# Altium PCB PCB1.PcbDoc
Units mm, origin at the board's own origin, x right, y up, seen from the top; angles counter-clockwise.
Board outline 52.58 x 36.07 mm, 2 copper layers (Top Layer, Bottom Layer); 11 components, 21 nets, 62 pads, 0 vias.
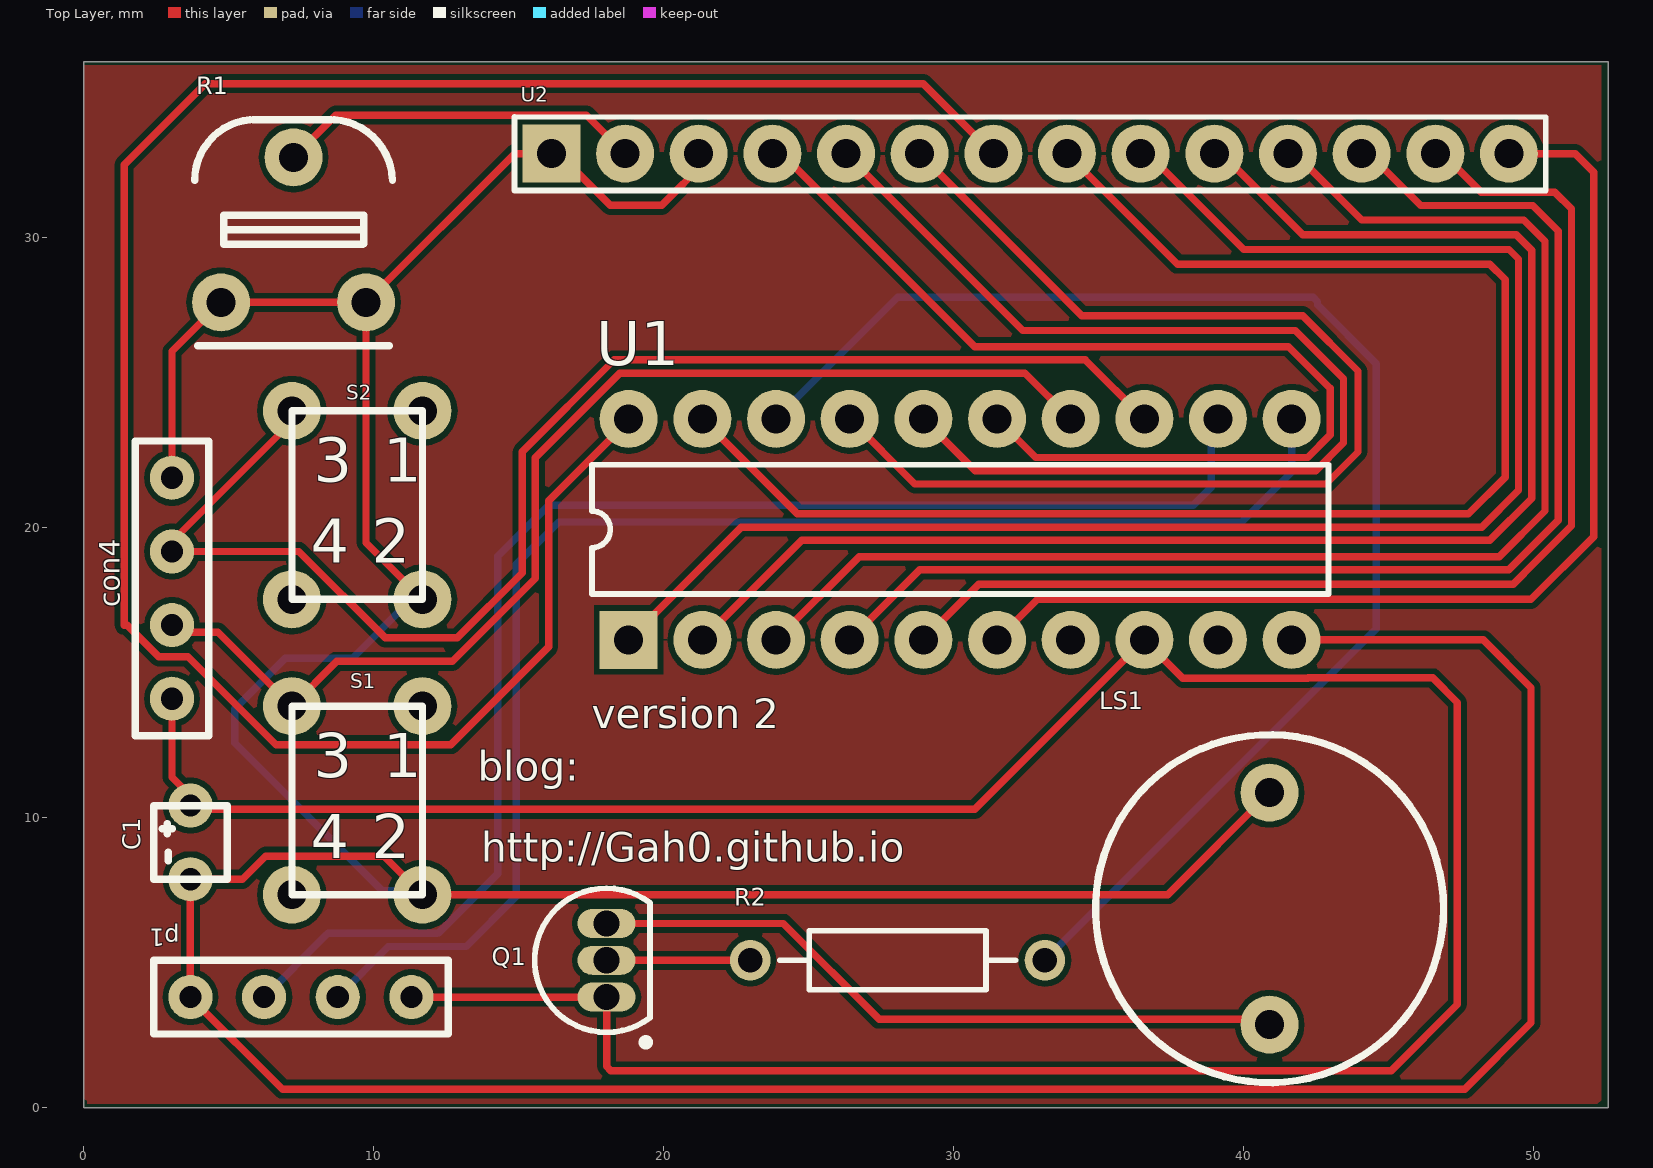
[diagram p0: Top Layer view]
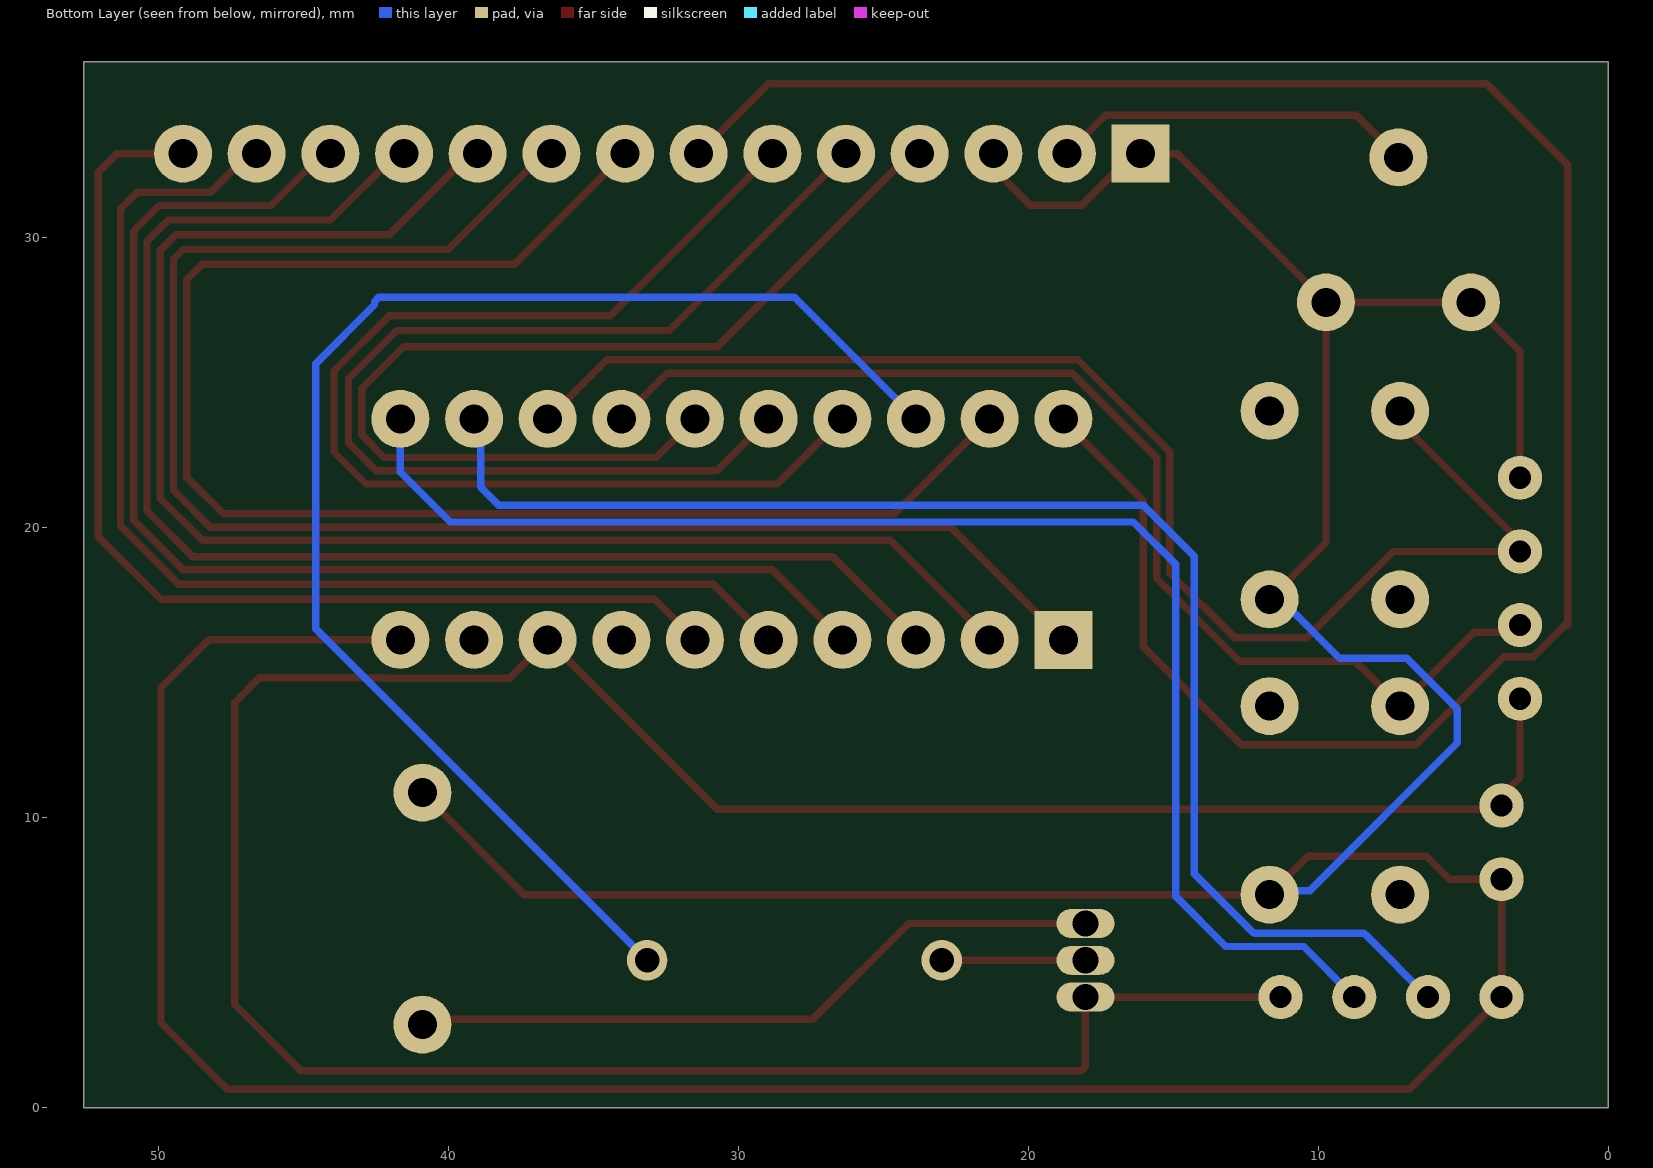
[diagram p1: Bottom Layer view, seen from below]

## Layer stack, top to bottom
Top Solder: solder mask 0.0102, Solder Resist, Dk 3.5
Top Layer: signal copper 0.0356
Dielectric 1: dielectric 0.32, FR-4, Dk 4.8
Bottom Layer: signal copper 0.0356
Bottom Solder: solder mask 0.0102, Solder Resist, Dk 3.5

## Board outline
0,0 0,36.068 52.578,36.068 52.578,0

## Design rules (kind name [scope] priority, off if disabled: settings)
Clearance [All] p1: gap=0.203 ignorepadtopadclearanceinfootprint=FALSE
PolygonConnect [All] p1: connectstyle=Direct reliefconductorwidth=0.254 reliefentries=4 polygonreliefangle="90 Angle" airgapwidth=0.254
RoomDefinition SHEET1 [InComponentClass('SHEET1')] p1: confinementstyle=ConfineIn formatcopy=TRUE lockcomponents=FALSE outline 26.162,1.524 95.504,1.524 95.504,40.132 26.162,40.132
RoutingVias [All] p1: holewidth=0.711 width=1.27 viastyle="Through Hole" minholewidth=0.711 minwidth=1.27 maxholewidth=0.711 maxwidth=1.27
SolderMaskExpansion [All] p1: expansion=0.102 istentingtop=FALSE
UnRoutedNet [All] p1: checkbadconnections=TRUE
Width [All] p1: maxlimit=0.5 minlimit=0.254 preferedwidth=0.254
29 further rules are at their usual default settings.

## Components (designator, comment, footprint, x,y, rotation, side; value= is the part's Value field where it differs from the comment)
C1 "Cap" LED 3.683,7.874 r270 top value=0.1uF
con4 "ultrasonic" sonic 3.048,14.097 r90 top
LS1 "Speaker" SPEAKER 40.894,6.858 r90 top
p1 "POWER" POWER 3.683,3.81 r0 top
Q1 "2N3906" TO-92A 18.034,5.08 r0 top
R1 "RPot" RESADJ 4.739,27.766 r0 top value=10k
R2 "Res2" AXIAL-0.4 28.067,5.08 r180 top value=220R
S1 "SW-PB" BOTTOM 7.184,13.843 r0 top
S2 "SW-PB" BOTTOM 7.184,24.026 r0 top
U1 "IAP15F2K61S2" DIP20 18.796,16.129 r90 top
U2 "LM016L" LCD1602 16.129,32.893 r90 top

## Footprints (in the part's own frame and the unit in brackets; to place one, negate y for a bottom-side part, rotate by r counter-clockwise, add the part's x,y. Pads: shape width x height; smd on the part's side, far side on the other; paste and mask are expansions set on the pad)
AXIAL-0.4 [mm] "Axial Device, Thru-Hole; 2 Leads; 0.4 in Pin Spacing"
  round 1.4 hole 0.85: 1(-5.08,0) 2(5.08,0)
  silkscreen extent -4.06,-1.02 4.06,1.02
BOTTOM [mm]
  round 2 hole 1: 1(0,0) 2(4.5,-6.5) 28(4.5,0) 29(0,-6.5)
  silkscreen extent 0,-6.5 4.5,0
DIP20 [mm]
  rect 2x2 hole 1: 1(0,0)
  round 2 hole 1: 2(0,-2.54) 3(0,-5.08) 4(0,-7.62) 5(0,-10.16) 6(0,-12.7) 7(0,-15.24) 8(0,-17.78) 9(0,-20.32) 10(0,-22.86) 11(7.62,-22.86) 12(7.62,-20.32) 13(7.62,-17.78) 14(7.62,-15.24) 15(7.62,-12.7) 16(7.62,-10.16) 17(7.62,-7.62) 18(7.62,-5.08) 19(7.62,-2.54) 20(7.62,0)
  silkscreen extent 1.58,-24.13 6.04,1.27
LCD1602 [mm]
  rect 2x2 hole 1: 1(0,0)
  round 2 hole 1: 2(0,-2.54) 3(0,-5.08) 4(0,-7.62) 5(0,-10.16) 6(0,-12.7) 7(0,-15.24) 8(0,-17.78) 9(0,-20.32) 10(0,-22.86) 11(0,-25.4) 12(0,-27.94) 13(0,-30.48) 14(0,-33.02)
  silkscreen extent -1.27,-34.29 1.27,1.27
LED [mil]
  round 60 hole 30: 1(-100,0) 2(0,0)
  silkscreen extent -100,-50 0,50
POWER [mil]
  round 60 hole 30: 18(0,0) 19(100,0) 20(200,0) 21(300,0)
  silkscreen extent -50,-50 350,50
RESADJ [mm]
  round 2 hole 1: 1(0,0) 2(5,0) 3(2.5,5)
  silkscreen extent -0.91,-1.5 5.91,6.3
sonic [mil]
  round 60 hole 30: 1(0,0) 2(100,0) 3(200,0) 5(300,0)
  silkscreen extent -50,-50 350,50
SPEAKER [mm]
  round 2 hole 1: 1(-4,0) 2(4,0)
  silkscreen extent -6,-6 6,6
TO-92A [mm] "TO, Flat Index; 3 In-Line, Axial Leads; Body Dia. 4.5mm; Leads 0.51 x 0.48 mm (max)"
  oval 2x1 hole 0.9: 1(0,-1.27) 2(0,0) 3(0,1.27)
  silkscreen extent -2.48,-2.95 1.5,2.48, body extent -2.48,-2.5 1.5,2.5, height 6.86

## Part data
C1: "Capacitor", LatestRevisionDate=17-Jul-2002, LatestRevisionNote="Re-released for DXP Platform.", PackageDescription="Radial Cap, Thru-Hole; 2 Leads; 0.3 in Pin Spacing", PackageReference=RAD-0.3, Published=8-Jun-2000, Publisher="Altium Limited"
LS1: "Loudspeaker", LatestRevisionDate=17-Jul-2002, LatestRevisionNote="Re-released for DXP Platform.", PackageReference=PIN2, Published=24-Mar-1999, Publisher="Altium Limited"
Q1: "PNP General Purpose Amplifier", ComponentLink1Description="Manufacturer Link", ComponentLink1URL=http://www.fairchildsemi.com/, ComponentLink2Description=Datasheet, ComponentLink2URL=http://www.fairchildsemi.com/ds/2N%2F2N3906.pdf, DatasheetVersion=1997, LatestRevisionDate=15-Jan-2003, LatestRevisionNote="PCB Footprint 'BCY-W3/D4.7' replaced", PackageDescription="TO, Flat Index; 3 In-Line, Axial Leads; Body Dia. 4.5mm; Leads 0.51 x 0.48 mm (max)", PackageReference=TO-92A, PackageVersion=Sep-1998, Published=8-Jun-2000, Publisher="Altium Limited"
R1: "Potentiometer", LatestRevisionDate=17-Jul-2002, LatestRevisionNote="Re-released for DXP Platform.", PackageDescription="Variable Resistor, Thru-Hole; 3 Leads", PackageReference=VR5, Published=8-Jun-2000, Publisher="Altium Limited", Set Position=0.5, Sim Note="Enter the Resistance value and the set point into parameter fields."
R2: "Resistor", LatestRevisionDate=17-Jul-2002, LatestRevisionNote="Re-released for DXP Platform.", PackageDescription="Axial Device, Thru-Hole; 2 Leads; 0.4 in Pin Spacing", PackageReference=AXIAL-0.4, Published=8-Jun-2000, Publisher="Altium Limited"
S1 S2: "Switch", LatestRevisionDate=17-Jul-2002, LatestRevisionNote="Re-released for DXP Platform.", PackageDescription="Switch; 2 Leads", PackageReference=SPST-2, Published=24-Mar-1999, Publisher="Altium Limited"

## Nets (pads, with @x,y where several pads share a name; then routed paths per layer and width w, separated by ;. In a path a pad name is that pad's centre, name@x,y a point inside that pad or via, vN(x,y) a via of type N, cw(c..) or ccw(c..) an arc to the next point about the centre after c; other vN are vias at no path point)
BEEP: R2.1 U1.18 | length 48.8
  Bottom Layer w0.254: U1.18 28.067,27.94 42.396,27.94 42.545,27.791 42.545,27.686 44.577,25.654 44.577,16.51 R2.1
E: U1.17 U2.6 | length 39.9
  Top Layer w0.254: U1.17 28.661,21.504 42.84,21.504 43.942,22.606 43.942,25.4 42.037,27.305 34.417,27.305 U2.6
ECHO: con4.3 S2.1 U1.13 | length 48.6
  Top Layer w0.254: S2.1 7.184,23.657 3.048,19.521 con4.3 7.414,19.177 10.395,16.196 11.684,16.196 12.882,16.196 15.121,18.435 15.121,22.614 18.288,25.781 34.544,25.781 U1.13
LCD0: U1.20 U2.7 | length 74.8
  Top Layer w0.254: U1.20 18.796,23.684 16.035,20.923 16.035,15.893 12.655,12.513 6.633,12.513 3.601,15.545 2.596,15.545 1.503,16.637 1.397,16.637 1.397,32.512 4.191,35.306 28.956,35.306 U2.7
LCD1: U1.19 U2.8 | length 53.3
  Top Layer w0.254: U1.19 24.613,20.472 47.756,20.472 49.022,21.739 49.022,28.553 48.492,29.083 37.719,29.083 U2.8
LCD2: U1.1 U2.9 | length 55.1
  Top Layer w0.254: U1.1 22.682,20.015 48.209,20.015 49.479,21.285 49.479,29.261 49.149,29.591 40.005,29.591 U2.9@36.703,32.893
LCD3: U1.2 U2.10 | length 51.3
  Top Layer w0.254: U1.2 24.765,19.558 48.492,19.558 49.936,21.002 49.936,29.566 49.403,30.099 42.037,30.099 U2.10@39.243,32.893
LCD4: U1.3 U2.11 | length 47.5
  Top Layer w0.254: U1.3 26.746,18.999 48.819,18.999 50.394,20.574 50.394,29.87 49.657,30.607 44.069,30.607 U2.11@41.783,32.893
LCD5: U1.4 U2.12 | length 43.7
  Top Layer w0.254: U1.4 28.829,18.542 49.137,18.542 50.851,20.255 50.851,30.226 49.971,31.106 46.11,31.106 U2.12@44.323,32.893
LCD6: U1.5 U2.13 | length 40.1
  Top Layer w0.254: U1.5 30.87,18.043 49.297,18.043 49.657,18.403 49.657,18.415 51.308,20.066 51.308,30.988 50.733,31.563 48.193,31.563 U2.13@46.863,32.893
LCD7: U1.6 U2.14 | length 37.5
  Top Layer w0.254: U1.6 32.893,17.526 49.911,17.526 52.07,19.685 52.07,32.258 51.435,32.893 U2.14@49.403,32.893
NetLS1_1: LS1.1 Q1.3 | length 24.3
  Top Layer w0.254: Q1.3 24.13,6.35 27.432,3.048 40.703,3.048 LS1.1
NetQ1_2: Q1.2 R2.2 | length 5
  Top Layer w0.254: Q1.2 R2.2
NetR1_3: R1.3 U2.2 | length 12.8
  Top Layer w0.254: R1.3 8.696,34.223 17.339,34.223 U2.2 U2.2@18.923,32.893
RS: U1.15 U2.4 | length 36.6
  Top Layer w0.254: U2.4 24.079,32.893 30.734,26.238 41.546,26.238 42.986,24.798 42.986,23.198 42.207,22.419 32.826,22.419 U1.15
RW: U1.16 U2.5 | length 38.2
  Top Layer w0.254: U2.5 32.385,26.797 41.783,26.797 43.443,25.137 43.443,22.92 42.485,21.962 30.743,21.962 U1.16
RXD: p1.20 U1.11 | length 48.9
  Bottom Layer w0.254: p1.20 10.51,5.557 11.623,5.557 ccw(c11.684,7.343) 11.741,5.557 13.194,5.557 14.922,7.285 14.922,18.732 16.383,20.193 39.933,20.193 41.656,21.916 U1.11
S+: C1.1 con4.1 p1.21 Q1.1 U1.8 | length 100.9
  Top Layer w0.254: con4.1 3.048,11.393 3.683,10.758 C1.1 3.81,10.287 30.734,10.287 U1.8 37.906,14.799 42.207,14.799 42.224,14.816 46.525,14.816 47.371,13.97 47.371,3.556 45.085,1.27 18.183,1.27 18.034,1.419 Q1.1 p1.21
S-: C1.2 con4.5 LS1.2 p1.18 R1.1 R1.2 S1.2 S2.2 U1.10 U2.1 U2.3 | length 168.7
  Top Layer w0.254: con4.5 3.048,26.075 R1.1 R1.2 ; S2.2 9.739,19.471 R1.2 ; U2.3@21.463,32.893 21.463,32.639 19.939,31.115 18.161,31.115 16.383,32.893 14.866,32.893 R1.2 ; LS1.2 37.379,7.343 S1.2 10.354,8.673 6.28,8.673 5.481,7.874 C1.2 p1.18 6.858,0.635 47.625,0.635 49.911,2.921 49.911,14.478 48.26,16.129 U1.10
  Bottom Layer w0.254: S1.2 11.55,7.477 10.303,7.477 5.207,12.573 5.207,13.747 6.954,15.494 9.271,15.494 11.303,17.526 S2.2
TRIG: con4.2 S1.1 U1.14 | length 40
  Top Layer w0.254: con4.2 3.291,16.394 4.633,16.394 S1.1 8.728,15.387 12.719,15.387 15.578,18.246 15.578,22.412 18.49,25.324 32.461,25.324 U1.14
TXD: p1.19 U1.12 | length 48.8
  Bottom Layer w0.254: p1.19 8.351,5.938 8.426,6.013 10.32,6.014 11.632,6.014 ccw(c11.684,7.343) 11.736,6.014 12.131,6.014 12.166,6.014 ccw(c12.172,6.168) 12.281,6.059 14.281,8.059 14.281,19.016 16.035,20.77 38.26,20.77 38.878,21.387 38.878,23.511 U1.12
pads on no net: S1.28 S1.29 S2.28 S2.29 U1.7 U1.9

## Polygon pours and split planes (outlines as drawn)
no net on Top Layer "NONET_L01_P000" (solid, pour order 0): 0,35.941 52.324,35.941 52.324,0.254 52.197,0.127 0.127,0.127 0.127,0.254 0,0.127

## Silkscreen, mask and mechanical layers (free items; w line width, h text height)
Top Overlay:
  text "version 2" at 17.526,13.081 h1.02
  text "blog:" at 13.589,11.263 h1.02
  text "http://Gah0.github.io" at 13.716,8.469 h1.02
Mechanical 1:
  the board outline again, w0.254

## Dimensions
0,36.068 to 0,0 on Mechanical 1
0,0 to 52.578,0 on Mechanical 1

## Text inside footprints (layer, text, board x,y; h text height)
S1: Top Overlay "4" at 7.838,8.597 h1.52; Top Overlay "2" at 9.938,8.597 h1.52; Top Overlay "3" at 7.938,11.397 h1.52; Top Overlay "1" at 10.338,11.397 h1.52
S2: Top Overlay "1" at 10.338,21.58 h1.52; Top Overlay "3" at 7.938,21.58 h1.52; Top Overlay "2" at 9.938,18.78 h1.52; Top Overlay "4" at 7.838,18.78 h1.52